# EAGLE board CELLA FRIGO (EAGLE 7.6.0)

Size 73.58 x 76.09 mm. Coordinates in mm from the lower left corner, seen from the top.
Outline: 0,0 56.82,0 56.82,53.33 0,53.33 0,0
Copper layers (1*16): Top 0.035mm / dielectric 1.5mm / Bottom 0.035mm
Design rules "default": minimum track width 10mil, minimum drill 24mil, track to track 8mil, track to pad 8mil, pad to pad 8mil, via to via 8mil, smd to smd 8mil, copper to edge 40mil, drill to drill 8mil, minimum pad ring 10mil, minimum via ring 8mil, stop-mask expansion 4mil, vias tented up to drill 0mil, thermal gap 10mil

## Footprints (pad centres in the part's own frame; a part is rotated, then mirrored left to right if it is on the bottom)
LED5MM = drill 0.813 octagon: A -1.27,0; K 1.27,0
M3XXH = drill 1.016 long: 1 -3.81,3.81; 2 -3.81,-3.81; O -6.35,-3.81; P 6.35,-3.81; P@ 6.35,3.81; S -6.35,3.81
0207/10 = drill 0.813 octagon: 1 -5.08,0; 2 5.08,0
B25V = drill 0.813 long: A 2.54,0.635; E -2.54,0.635; S 0,0.635
TL1105 = drill 1 pad 1.676: 1 -2.25,3.25; 2 2.25,3.25; 3 -2.25,-3.25; 4 2.25,-3.25
1X16P-2.54-2.54-11.6-3.0-BLACK-MALE = drill 0.889 pad 1.651 square: 1 0,19.05 | drill 0.889 pad 1.651: 2 0,16.51; 3 0,13.97; 4 0,11.43; 5 0,8.89; 6 0,6.35; 7 0,3.81; 8 0,1.27; 9 0,-1.27; 10 0,-3.81; 11 0,-6.35; 12 0,-8.89; 13 0,-11.43; 14 0,-13.97; 15 0,-16.51; 16 0,-19.05
ARDUINO_UNO = drill 1.016 pad 1.88: 0 63.5,50.8; 1 60.96,50.8; 2 58.42,50.8; 3 55.88,50.8; 3.3V 35.56,2.54; 4 53.34,50.8; 5 50.8,50.8; 5V 38.1,2.54; 6 48.26,50.8; 7 45.72,50.8; 8 41.656,50.8; 9 39.116,50.8; 10 36.576,50.8; 11 34.036,50.8; 12 31.496,50.8; 13 28.956,50.8; A0 50.8,2.54; A1 53.34,2.54; A2 55.88,2.54; A3 58.42,2.54; A4 60.96,2.54; A5 63.5,2.54; AREF 23.876,50.8; GND 26.416,50.8; GND. 43.18,2.54; GND.. 40.64,2.54; I/OREF 30.48,2.54; N/C 27.94,2.54; RESET 33.02,2.54; SCL 18.796,50.8; SDA 21.336,50.8; VIN 45.72,2.54 | hole 3.2: 66.04,7.62; 66.04,35.56; 15.24,50.8; 13.97,2.54
TO92 = drill 0.813 octagon: 1 1.27,0; 2 0,1.905; 3 -1.27,0

## Placement (x,y rotation side)
D1  [LED5MM]  5,73.58 0 top
D2  [LED5MM]  5,86.28 0 top  (outside the outline)
D3  [LED5MM]  5,98.98 0 top  (outside the outline)
KMOTORE  [M3XXH]  5,60.88 0 top
KPERIODO  [M3XXH]  5,35.48 0 top
KVENTOLA  [M3XXH]  5,48.18 0 top
R1  220‎Ω  [0207/10]  5,111.68 0 top  (outside the outline)
R2  33‎Ω  [0207/10]  5,124.38 0 top  (outside the outline)
R3  33‎Ω  [0207/10]  5,137.08 0 top  (outside the outline)
R4  33‎Ω  [0207/10]  5,149.78 0 top  (outside the outline)
R5  330‎Ω  [0207/10]  5,162.48 0 top  (outside the outline)
R6  330‎Ω  [0207/10]  5,175.18 0 top  (outside the outline)
R7  330‎Ω  [0207/10]  5,187.88 0 top  (outside the outline)
R8  2k‎Ω  [0207/10]  5,289.48 0 top  (outside the outline)
R9  510‎Ω  [0207/10]  5,302.18 0 top  (outside the outline)
R10  820‎Ω  [0207/10]  5,314.88 0 top  (outside the outline)
R11  1.8k‎Ω  [0207/10]  5,327.58 0 top  (outside the outline)
R12  5.1k‎Ω  [0207/10]  5,340.28 0 top  (outside the outline)
RpotTemperatura1  10‎Ω  [B25V]  5,213.28 0 top  (outside the outline)
RpotUmidità  10‎Ω  [B25V]  5,225.98 0 top  (outside the outline)
S1  [TL1105]  5,352.98 0 top  (outside the outline)
SDOWN  [TL1105]  5,251.38 0 top  (outside the outline)
SLEFT  [TL1105]  5,264.08 0 top  (outside the outline)
SSELECT  [TL1105]  5,276.78 0 top  (outside the outline)
SUP  [TL1105]  5,238.68 0 top  (outside the outline)
U1  [1X16P-2.54-2.54-11.6-3.0-BLACK-MALE]  5,10.08 0 top
U2  [ARDUINO_UNO]  5,22.78 0 top
U3  [TO92]  5,200.58 0 top  (outside the outline)

## Library data of the parts
D1-D3 KMOTORE KPERIODO KVENTOLA R1-R12 RpotTemperatura1 RpotUmidità S1 SDOWN SLEFT SSELECT SUP U1-U3 = AUTODESK_CIRCUITS_BREADBOARD

## Nets
N$1: U1.4 U2.6
N$2: U1.9
N$3: U1.10
N$4: U1.11 U2.8
N$5: U1.14 U2.11
N$6: U1.12 U2.9
N$7: U1.6 U2.7
N$8: R1.1 U1.15
N$9: U1.7
N$10: U1.8
N$11: U1.13 U2.10
N$12: KPERIODO.1 U2.5
N$13: KPERIODO.P
N$14: KPERIODO.P@ R4.1
N$15: KPERIODO.O
N$16: D1.A KPERIODO.S
N$17: KVENTOLA.1 U2.4
N$18: KVENTOLA.P
N$19: KVENTOLA.P@ R3.1
N$20: KVENTOLA.O
N$21: D2.A KVENTOLA.S
N$22: KMOTORE.1 U2.3
N$23: KMOTORE.P
N$24: KMOTORE.P@ R2.1
N$25: KMOTORE.O
N$26: D3.A KMOTORE.S
N$27: D1.K R7.1
N$28: D2.K R6.1
N$29: D3.K R5.1
N$30: RpotTemperatura1.S U2.A1 U3.2
N$31: RpotUmidità.S U2.A2
N$32: R8.1 R9.1 S1.1 U2.A0
N$33: R9.2 R10.1 SUP.1
N$34: R10.2 R11.1 SDOWN.1
N$35: R11.2 R12.1 SLEFT.1
N$36: R12.2 SSELECT.1
N$37: KMOTORE.2 KPERIODO.2 KVENTOLA.2 R5.2 R6.2 R7.2 RpotTemperatura1.E RpotUmidità.E S1.2 SDOWN.2 SLEFT.2 SSELECT.2 SUP.2 U1.1 U1.3 U1.5 U1.16 U2.GND.. U3.1
N$38: R1.2 R2.2 R3.2 R4.2 R8.2 RpotTemperatura1.A RpotUmidità.A U1.2 U2.5V U3.3
N$39: SUP.4
N$40: SUP.3
N$41: SDOWN.4
N$42: SDOWN.3
N$43: SLEFT.4
N$44: SLEFT.3
N$45: SSELECT.4
N$46: SSELECT.3
N$47: S1.4
N$48: S1.3

## Tracks (layer width: path | path; a pad name or v marks a point on that pad's centre or on a via)
N$1  (1 unrouted)
N$4  (1 unrouted)
N$5  (1 unrouted)
N$6  (1 unrouted)
N$7  (1 unrouted)
N$8  (1 unrouted)
N$11  (1 unrouted)
N$12  (1 unrouted)
N$14  (1 unrouted)
N$16  (1 unrouted)
N$17  (1 unrouted)
N$19  (1 unrouted)
N$21  (1 unrouted)
N$22  (1 unrouted)
N$24  (1 unrouted)
N$26  (1 unrouted)
N$27  (1 unrouted)
N$28  (1 unrouted)
N$29  (1 unrouted)
N$30  (2 unrouted)
N$31  (1 unrouted)
N$32  (3 unrouted)
N$33  (2 unrouted)
N$34  (2 unrouted)
N$35  (2 unrouted)
N$36  (1 unrouted)
N$37  (18 unrouted)
N$38  (9 unrouted)